# Altium PCB 2019_PROPEEPROM_FAB_ESEO.PcbDoc
Units mil, origin at the board's own origin, x right, y up, seen from the top; angles counter-clockwise.
Board outline 910 x 530 mil, 4 copper layers (1-TOP, 2-SIGNAL, 3-GND, 4-BOT), stack 68 mil thick; 7 components, 9 nets, 24 pads, 6 vias.
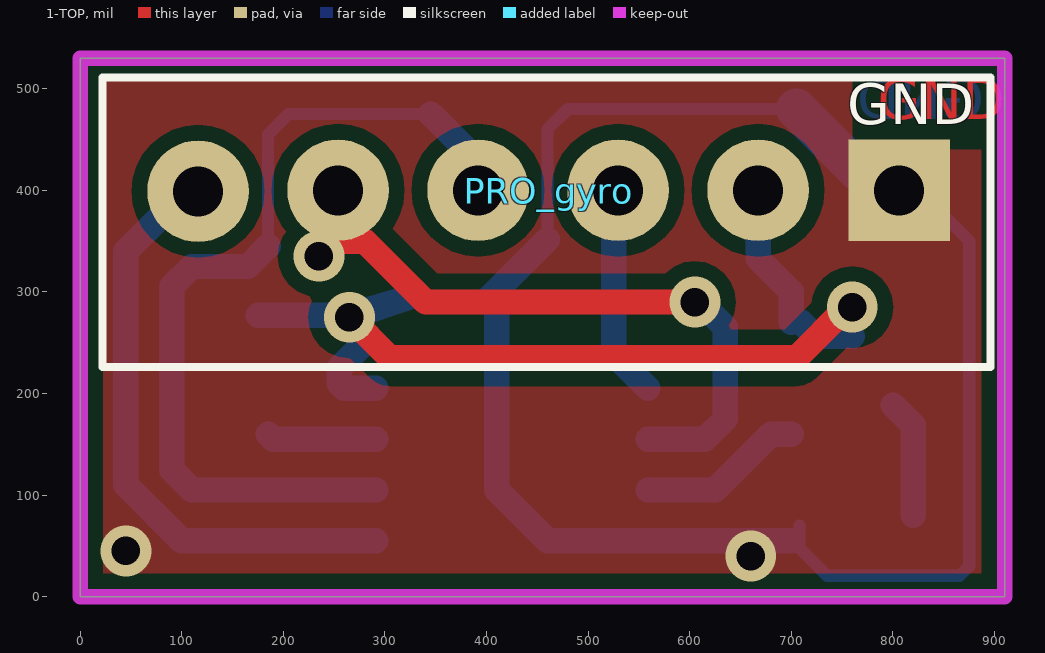
[diagram p0: 1-TOP view]
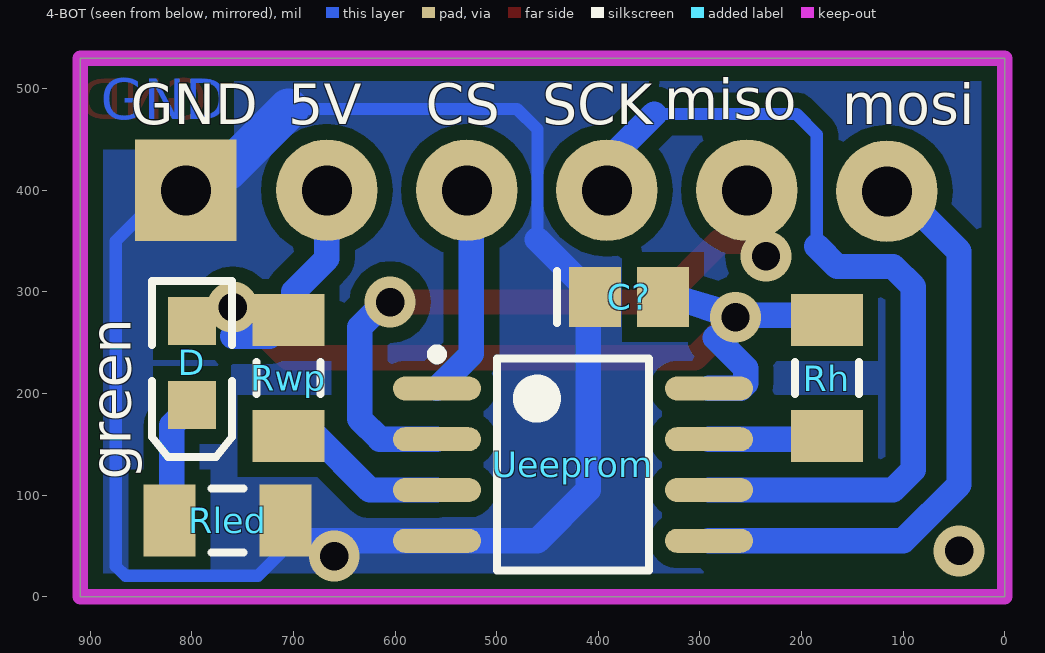
[diagram p1: 4-BOT view, seen from below]
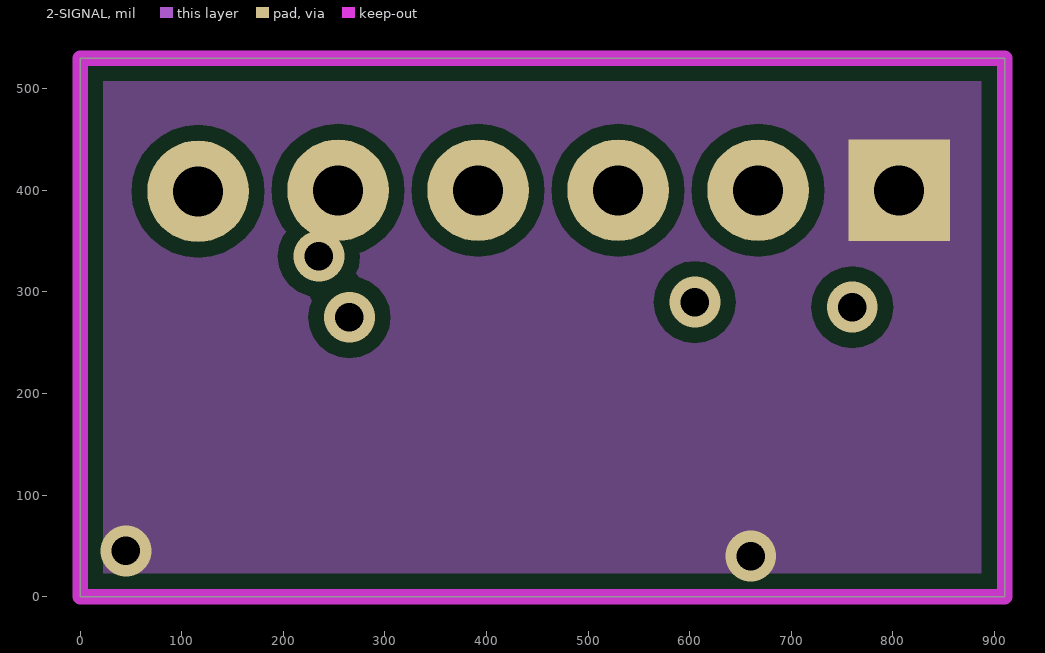
[diagram p2: 2-SIGNAL]
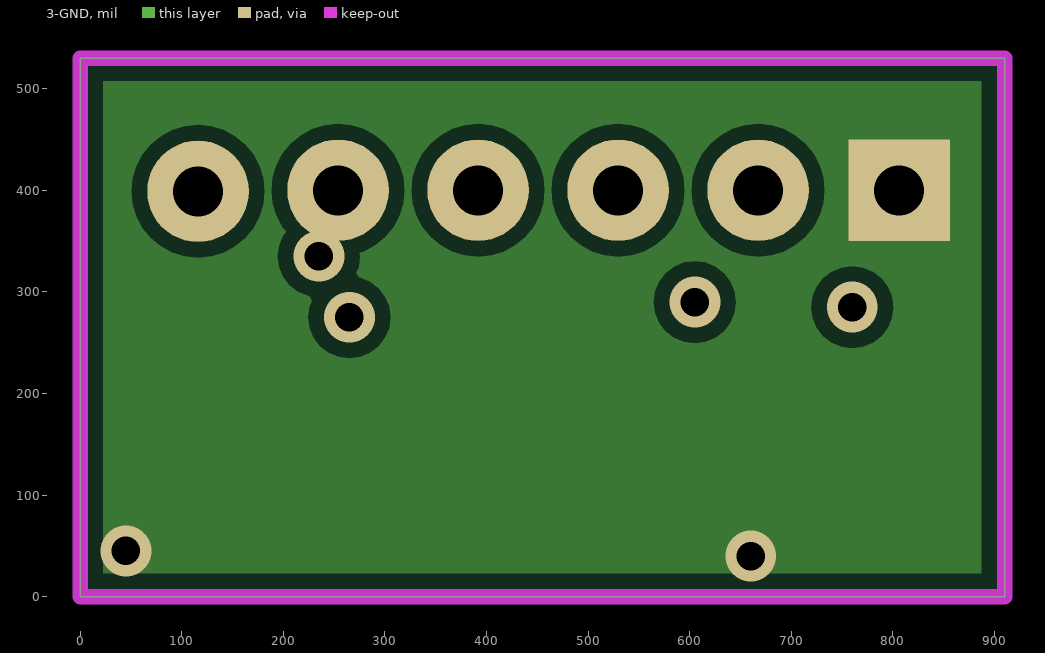
[diagram p3: 3-GND]
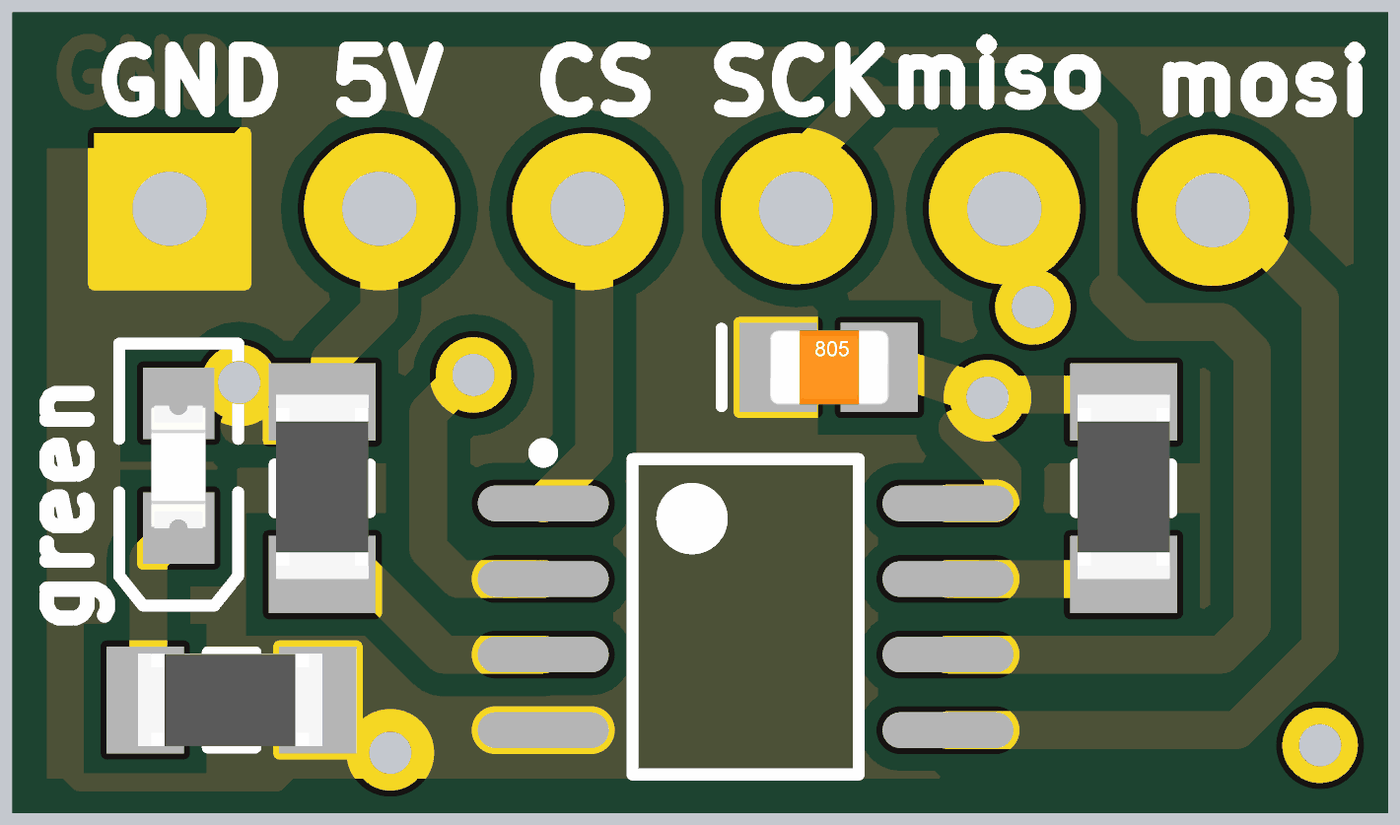
[diagram p4: 3D render of the assembled board from below, using the file's embedded part models]

## Layer stack, top to bottom
Top Solder: solder mask 0.4, Solder Resist, Dk 3.5
1-TOP: signal copper 1.4
Dielectric1: core 20.8, FR-4, Dk 4.8
2-SIGNAL: signal copper 1.4
Dielectric2: prepreg 20.8, FR-4, Dk 4.8
3-GND: signal copper 1.4
Dielectric3: core 20.8, FR-4, Dk 4.8
4-BOT: signal copper 1.4
Bottom Solder: solder mask 0.4, Solder Resist, Dk 3.5

## Board outline
0,0 0,530 910,530 910,0

## Design rules (kind name [scope] priority, off if disabled: settings)
Clearance Clearance_4 [InNamedPolygon('GND_TOP') Or  InNamedPolygon('3-GND') Or  InNamedPolygon('2-GND') Or  InNamedPolygon('4-GND')] p1: gap=15
Clearance Clearance_3 [InNamedPolygon('4-GND') Or  InNamedPolygon('GND_TOP') Or  InNamedPolygon('2-GND') Or  InNamedPolygon('3-GND')] p2: gap=10
Clearance Clearance_2 [InNamedPolygon('4-GND') Or  InNamedPolygon('2-GND') Or  InNamedPolygon('3-GND') Or  InNamedPolygon('1-GND') Or  InNamedPolygon('2-GND24')] p3: gap=10
Clearance Clearance_1 [InNamedPolygon('2-GND') Or  InNamedPolygon('3-GND') Or  InNamedPolygon('1-GND') Or  InNamedPolygon('4-GND')] p4: gap=10
Clearance [All] p5: gap=7
FabricationTestpoint [(IsPad And (OnTopLayer Or OnBottomLayer))] p1: side=3 testpointundercomponent=TRUE minsize=40 maxsize=100 preferedsize=60 minholesize=0 maxholesize=40 preferedholesize=32 testpointgrid=1 allowsidetop=TRUE allowsidebottom=TRUE usegrid=TRUE gridtolerance=0.01
HoleSize [All] p1: absolutevalues=TRUE maxlimit=200 minlimit=1 maxpercent=80.000 minpercent=20.000
PlaneConnect [All] p1: planeconnectstyle=Direct reliefexpansion=20 reliefentries=4 reliefconductorwidth=10 reliefairgap=10
PolygonConnect [All] p1: connectstyle=Direct reliefconductorwidth=10 reliefentries=4 polygonreliefangle="90 Angle" airgapwidth=10
RoomDefinition 2019_PROPEEPROM [InComponentClass('2019_PROPEEPROM')] p1: confinementstyle=ConfineIn formatcopy=TRUE lockcomponents=FALSE outline 3234.92,-2391.14 2704.92,-2391.14 2704.92,-1841.14 3234.92,-1841.14
RoutingVias [All] p1: holewidth=28 width=50 viastyle="Through Hole" minholewidth=28 minwidth=50 maxholewidth=28 maxwidth=50
SilkToSolderMaskClearance SilkscreenOverComponentPads [IsPad] p1: minsilkscreentomaskgap=10 clearancetoexposedcopper=TRUE
SolderMaskExpansion [All] p1: expansion=4
Width [All] p1: maxlimit=200 minlimit=10 preferedwidth=15
25 further rules are at their usual default settings.

## Classes and differential pairs
component class 2019_PROPEEPROM: C? D Rh Rled Rwp Ueeprom

## Components (designator, comment, footprint, x,y, rotation, side; value= is the part's Value field where it differs from the comment)
C? "100nF" C0805_N 370,295 r180 bottom
D "LED verte" LED_0805 800,230 r270 bottom
PRO_gyro "BORNIER_6V_3.5MM" BORNIER_6V_3.5MM 805,400 r180 top
Rh "22" R1206_N 175,215 r90 bottom
Rled "1k" R1206_N 765,75 r0 bottom
Rwp "22" R1206_N 705,215 r90 bottom
Ueeprom "25LC1024-E/SM or M95M02-DR" SOIJ-SM8_N 425,130 r180 bottom

## Footprints (in the part's own frame and the unit in brackets; to place one, negate y for a bottom-side part, rotate by r counter-clockwise, add the part's x,y. Pads: shape width x height; smd on the part's side, far side on the other; paste and mask are expansions set on the pad)
BORNIER_6V_3.5MM [mm]
  rect 2.54x2.54 hole 1.25: 1(-0.025,0)
  round 2.54 hole 1.25: 2(3.5,0) 3(7,0) 4(10.5,0) 5(14,0) 6(17.5,0.025)
  silkscreen extent -2.31,-2.82 19.89,4.42
C0805_N [mm] "Chip Capacitor, Body 2.0x1.3mm, IPC Medium Density"
  rect 1.3x1.5 smd: 1(-0.85,0) 2(0.85,0)
  silkscreen extent -1.8,-0.65 -1.8,0.65, body extent -0.99,-0.62 1.01,0.63, height 0.8
LED_0805 [mm] "SM LED; 2 Flat Leads"
  rect 1.2x1.2 smd: 1(-1.05,0) 2(1.05,0)
  silkscreen extent -2.05,-1 2.35,1, body extent -1.05,-0.64 1.06,0.64, height 1.2
R1206_N [mm] "Chip Resistor, Body 3.2x1.6mm, IPC Medium Density"
  rect 1.3x1.8 smd: 1(-1.45,0) 2(1.45,0)
  silkscreen extent -0.4,-0.8 0.4,0.8, body extent -1.68,-0.87 1.68,0.87, height 0.71
SOIJ-SM8_N [mm] "SOP, 8-Leads, Body 5.2x5.2mm, Pitch 1.27mm, IPC Medium Density"
  oval 2.2x0.6 smd: 1(-3.4,1.905) 2(-3.4,0.635) 3(-3.4,-0.635) 4(-3.4,-1.905) 5(3.4,-1.905) 6(3.4,-0.635) 7(3.4,0.635) 8(3.4,1.905)
  silkscreen extent -3.52,-2.65 1.9,2.88, body extent -2.69,-2.67 2.69,2.67, height 2.04

## Part data
C?: library part Condensateur, "Capacitor"
D: library part LED, "Typical LED"
Rh Rled Rwp: library part Resistor, "Resistor"
Ueeprom: library part 25LC1024-E/SM, "1 Mbit SPI Bus Serial EEPROM, 8-Pin SOIC, Extended Temperature"

## Via types
v1: diameter 50, hole 28, 1-TOP to 4-BOT, 6 vias

## Nets (pads, with @x,y where several pads share a name; then routed paths per layer and width w, separated by ;. In a path a pad name is that pad's centre, name@x,y a point inside that pad or via, vN(x,y) a via of type N, cw(c..) or ccw(c..) an arc to the next point about the centre after c; other vN are vias at no path point)
5V: C?.2 D.1 PRO_gyro.2 Rh.2 Rwp.2 Ueeprom.8 | length 1050.1
  1-TOP w25: v1(265,275) 305,235 705,235 755,285 v1(760,285)
  4-BOT w25: Rh.2@175,277.09 265,277.09 C?.2@325,295 ; v1(265,275) C?.2@325,295 ; 285,255 255,225 255,210 260,205 Ueeprom.8 ; C?.2@330,300 C?.2@325,295 ; PRO_gyro.2 667.2,332.8 700,300 Rwp.2@700,270 ; Rwp.2@710,270 723.66,256.34 760,256.34
GND: C?.1 PRO_gyro.1 Rled.1 Ueeprom.4 | length 1594.3
  4-BOT w12: 460,351.54 460,460 480,480 705,480 ; Rled.1@707.91,70 707.91,47.59 735,20.5 865.5,20.5 875,30 875,350 PRO_gyro.1@845,380
  4-BOT w25: C?.1 460,351.54 ; C?.1@410,295 410,105 460,55 Ueeprom.4 Rled.1@700,55
  4-BOT w40: 705,480 PRO_gyro.1@765,420
  other v1: 660,40 45,45
NetD_2: D.2 Rled.2 | length 116.9
  4-BOT w25: D.2 820,168.66 Rled.2@820,80
NetRh_1: Rh.1 Ueeprom.7 | length 108.2
  4-BOT w25: Rh.1@185,160 190,155 Ueeprom.7
NetRwp_1: Rwp.1 Ueeprom.3 | length 163.9
  4-BOT w25: Ueeprom.3 625,105 680,160 Rwp.1@700,160
PRO_PB12_CS: PRO_gyro.3 Ueeprom.1 | length 204
  4-BOT w25: PRO_gyro.3@525,395 525,238.86 Ueeprom.1
PRO_PB13_SCK: PRO_gyro.4 Ueeprom.6 | length 880.8
  4-BOT w12: 185,345 185,455 205,475 345,475 ; PRO_gyro.4@385,390 PRO_gyro.4@385,435
  4-BOT w25: 185,345 165,325 110,325 90,305 90,125 110,105 Ueeprom.6 ; 345,475 PRO_gyro.4@385,435
PRO_PB14_MISO: PRO_gyro.5 Ueeprom.2 | length 625.8
  1-TOP w25: v1(235,335) 230,335 245,350 280,350 340,290 v1(605,290)
  4-BOT w25: Ueeprom.2 615,155 635,175 635,265 610,290 v1(605,290)
PRO_PB15_MOSI: PRO_gyro.6 Ueeprom.5 | length 569.6
  4-BOT w25: PRO_gyro.6@95,390 45,340 45,110 100,55 Ueeprom.5

## Polygon pours and split planes (outlines as drawn)
GND on 4-BOT "4-GND" (solid, pour order 8): 0,530 910,530 910,5 0,5
GND on 3-GND "3-GND" (solid, pour order 9): 0,530 910,530 910,10 0,10
GND on 2-SIGNAL "2-GND" (solid, pour order 10): 5,530 910,530 910,0 5,0
GND on 1-TOP "GND_TOP" (solid, pour order 11): 5,530 910,530 910,5 5,5

## Keep-outs
Keep-Out Layer:
  the board outline again, w15

## Other copper
1-TOP:
  text "GND" at 785,470 h40
4-BOT:
  text "GND" at 890,470 h40

## Silkscreen, mask and mechanical layers (free items; w line width, h text height)
Top Overlay:
  text "GND" at 755,465 h40
Bottom Overlay:
  text "miso" at 335,470 h40
  text "mosi" at 160,465 h40
  text "SCK" at 455,465 h40
  text "CS" at 570,465 h40
  text "5V" at 705,465 h40
  text "GND" at 860,465 h40
  text "green" at 860,115 h40 r270